# EAGLE board PCB (EAGLE 9.7.0)
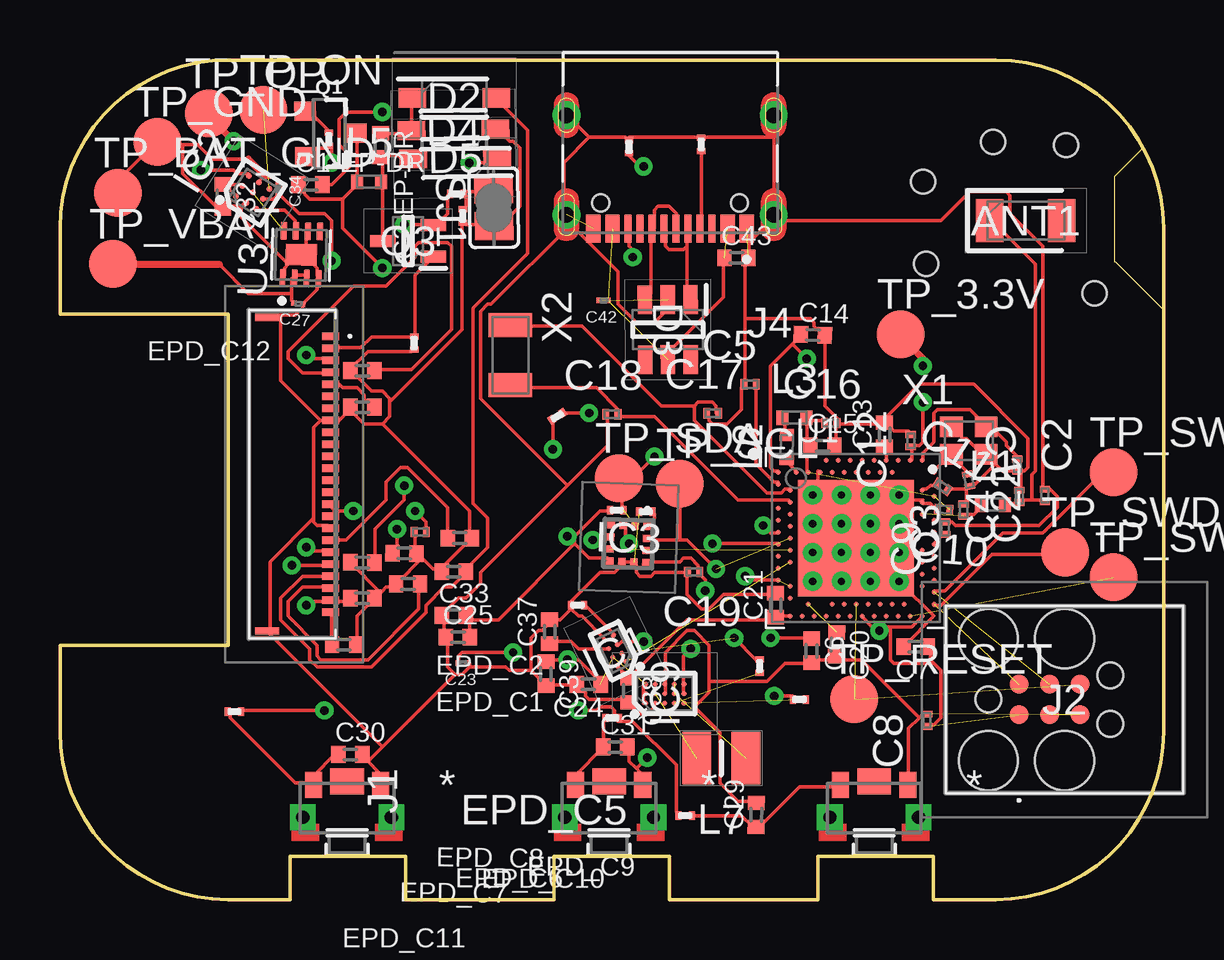
[diagram p0: board, top side]
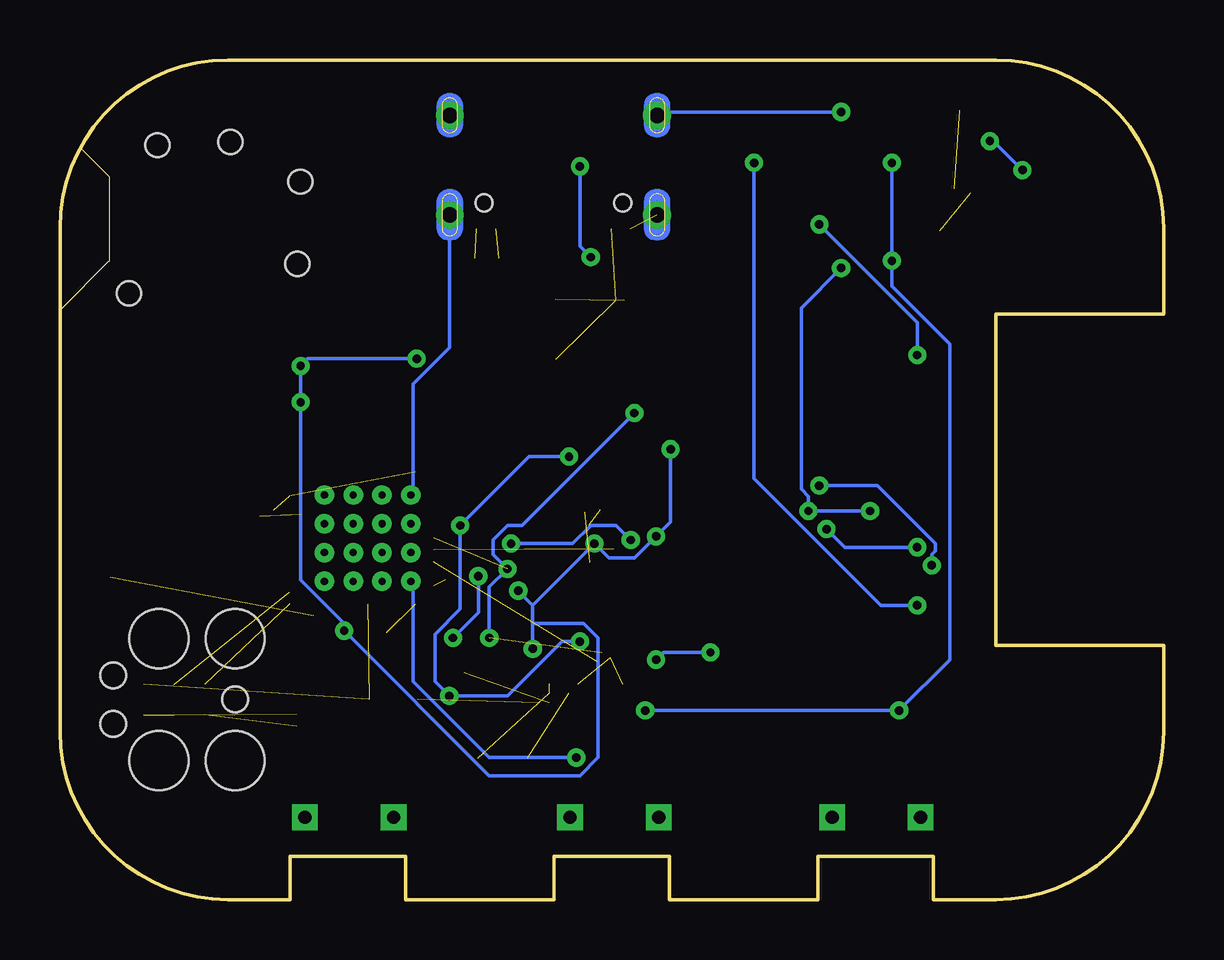
[diagram p1: board, bottom side, seen from below]

Size 46 x 35 mm. Coordinates in mm from the lower left corner, seen from the top.
Outline: 46,24.58 46,7 arc-90 39,0 36.4,0 36.4,1.8 31.6,1.8 31.6,0 25.4,0 25.4,1.8 20.6,1.8 20.6,0 14.4,0 14.4,1.8 9.6,1.8 9.6,0 7,0 arc-90 0,7 0,10.6 7,10.6 7,24.4 0,24.4 0,28 arc-90 7,35 39,35 arc-90 46,28 46,24.58
Outline: 45.15,31.34 43.95,30.13 43.95,26.59 43.99,26.59 46,24.58
Copper layers (1*16): Top 0.035mm / dielectric 1.5mm / Bottom 0.035mm
Design rules "Fusion Electronics Design Rules": minimum track width 0.15mm, minimum drill 0.35mm, track to track 6mil, track to pad 6mil, pad to pad 6mil, via to via 6mil, smd to smd 6mil, copper to edge 40mil, drill to drill 6mil, minimum pad ring 10mil, minimum via ring 8mil, stop-mask expansion 4mil, vias tented up to drill 9999mil, thermal gap 10mil
Holes 1 mm at 41.94,31.45 38.89,31.58 35.97,29.93 36.1,26.5 43.13,25.27

## Footprints (pad centres in the part's own frame; a part is rotated, then mirrored left to right if it is on the bottom)
2450AT18B100E_ANTC3216X140N = smd 1.15 x 1.8: 1 -1.5,0; 2 1.5,0
NORDIC_NRF_3_RESC0201_L = smd 0.28 x 0.43: 1 -0.255,0; 2 0.255,0
PERFECT_0402_0402 = smd 0.6 x 0.7: 1 -0.5,0; 2 0.5,0
GRM011R60J152KE01L_2_CAPC0201X13N = smd 0.22 x 0.23: 1 -0.185,0; 2 0.185,0
ESP32_C6_LIBRARY_5_SOD3716X135N = smd 1.15 x 0.8: 1 -1.75,0; 2 1.75,0
ESP32_C6_LIBRARY_3_SOT95P280X145-6N = smd 1.2 x 0.6: 1 -1.25,0.95; 2 -1.25,0; 3 -1.25,-0.95; 4 1.25,-0.95; 5 1.25,0; 6 1.25,0.95
BQ25180YBGR_BGA8C40P2X4_100X155X50 = smd 0.2 x 0.2: A1 -0.2,0.6; A2 0.2,0.6; B1 -0.2,0.2; B2 0.2,0.2; C1 -0.2,-0.2; C2 0.2,-0.2; D1 -0.2,-0.6; D2 0.2,-0.6
DRV2605YZFR_BGA9C50P3X3_144X144X62 = smd 0.25 x 0.25: A1 -0.5,0.5; A2 0,0.5; A3 0.5,0.5; B1 -0.5,0; B2 0,0; B3 0.5,0; C1 -0.5,-0.5; C2 0,-0.5; C3 0.5,-0.5
BMA423_BMA423 = smd 0.3 x 0.35: 1 -0.75,-0.775; 2 -0.25,-0.775; 3 0.25,-0.775; 4 0.75,-0.775; 7 0.75,0.775; 8 0.25,0.775; 9 -0.25,0.775; 10 -0.75,0.775 | smd 0.35 x 0.3: 5 0.775,-0.25; 6 0.775,0.25; 11 -0.775,0.25; 12 -0.775,-0.25
RT6160AWSC_BGA15C40P3X5_140X230X60 = smd 0.216 x 0.216: A1 -0.4,0.8; A2 0,0.8; A3 0.4,0.8; B1 -0.4,0.4; B2 0,0.4; B3 0.4,0.4; C1 -0.4,0; C2 0,0; C3 0.4,0; D1 -0.4,-0.4; D2 0,-0.4; D3 0.4,-0.4; E1 -0.4,-0.8; E2 0,-0.8; E3 0.4,-0.8
503480-2400_5034802400 = smd 0.3 x 0.7: 1 -5.75,1.525; 2 -5.25,1.525; 3 -4.75,1.525; 4 -4.25,1.525; 5 -3.75,1.525; 6 -3.25,1.525; 7 -2.75,1.525; 8 -2.25,1.525; 9 -1.75,1.525; 10 -1.25,1.525; 11 -0.75,1.525; 12 -0.25,1.525; 13 0.25,1.525; 14 0.75,1.525; 15 1.25,1.525; 16 1.75,1.525; 17 2.25,1.525; 18 2.75,1.525; 19 3.25,1.525; 20 3.75,1.525; 21 4.25,1.525; 22 4.75,1.525; 23 5.25,1.525; 24 5.75,1.525 | smd 0.3 x 1: MP1 -6.54,-1.125; MP2 6.54,-1.125
TC2030-IDC_TC2030IDC = smd 0.783 x 0.783: 1 -0.953,-0.635; 2 -0.953,0.635; 3 0.317,-0.635; 4 0.317,0.635; 5 1.588,-0.635; 6 1.588,0.635 | hole 2.451: -2.223,-2.54; -2.223,2.54; 0.952,-2.54; 0.952,2.54 | hole 1.067: -2.223,0; 2.857,-1.016; 2.857,1.016
KH-TYPE-C-16P_KINGHELM_KH-TYPE-C-16P = smd 0.6 x 1.15: A1_B12 -3.2,4.725; A4_B9 -2.4,4.725; A9_B4 2.4,4.725; A12_B1 3.2,4.725 | smd 0.3 x 1.15: A5 -1.25,4.725; A6 -0.25,4.725; A7 0.25,4.725; A8 1.25,4.725; B5 1.75,4.725; B6 0.75,4.725; B7 -0.75,4.725; B8 -1.75,4.725 | drill 0.65 pad 1.05: SH1 -4.32,0; SH2 4.32,0; SH3 -4.32,4.15; SH4 4.32,4.15 | hole 0.7: -2.89,3.65; 2.89,3.65
NORDIC_NRF_2_RESC0402_L = smd 0.5 x 0.6: 1 -0.5,0; 2 0.5,0
MLP2016SR47MT0S1_INDC2016X100N = smd 1.2 x 2.2: 1 -1.028,0; 2 1.028,0
ESP32_C6_LIBRARY_4_ESP32_C6_LIBRARY_4_ESP32_C6_LIBRARY_4_ESP32_C6_LIBRARY_4_ESP32_WROVER_SPARKFUN-DISCRETESEMI_SOT23-3 = smd 0.8 x 0.9: 1 -0.95,-1; 2 0.95,-1; 3 0,1.1
ESP32_C6_LIBRARY_6_SOT65P210X110-3N = smd 1.05 x 0.5: 1 -1.05,0.65; 2 -1.05,-0.65; 3 1.05,0
CPF0201D7K68C1_0201 = smd 0.35 x 0.25: 1 0,0.275; 2 0,-0.275
ERA-1AEB3401C_0201 = smd 0.35 x 0.25: 1 0,0.275; 2 0,-0.275
ESP32_C6_LIBRARY_7_JUMPER_SJ = smd 1.168 x 1.6: 1 -0.762,0; 2 0.762,0
2025-10-22_07-23-44_LIBRARY_SW_EVP-AKE31A_PAN = smd 0.711 x 1.092: 1 -1.4,-0.972; 2 1.4,-0.972 | drill 0.559 pad 0.914 square: 3 -1.848,0.381; 4 1.848,0.381 | smd 1.397 x 1.092: 5 0,-1.124
HECTOR_WATCH_1_TP20R = smd 2 x 2: TP 0,0
NORDIC_NRF_4_AQFN50P700X700X85_HS-74N = smd 4.85 x 4.85: P$74 0,0 | drill 0.3 pad 0.6: P$75 -1.8,1.8; P$76 -0.6,1.8; P$77 0.6,1.8; P$78 1.8,1.8; P$79 -1.8,0.6; P$80 -0.6,0.6; P$81 0.6,0.6; P$82 1.8,0.6; P$83 -1.8,-0.6; P$84 -0.6,-0.6; P$85 0.6,-0.6; P$86 1.8,-0.6; P$87 -1.8,-1.8; P$88 -0.6,-1.8; P$89 0.6,-1.8; P$90 1.8,-1.8 | smd 0.2 x 0.2: P$A8 -1.25,3.25; P$A10 -0.75,3.25; P$A12 -0.25,3.25; P$A14 0.25,3.25; P$A16 0.75,3.25; P$A18 1.25,3.25; P$A20 1.75,3.25; P$A22 2.25,3.25; P$A23 2.75,3.25; P$AA24 3.25,-2.25; P$AB2 -2.75,-2.5; P$AC5 -2,-2.75; P$AC9 -1,-2.75; P$AC11 -0.5,-2.75; P$AC13 0,-2.75; P$AC15 0.5,-2.75; P$AC17 1,-2.75; P$AC19 1.5,-2.75; P$AC21 2,-2.75; P$AC24 3.25,-2.75; P$AD2 -2.75,-3.25; P$AD4 -2.25,-3.25; P$AD6 -1.75,-3.25; P$AD8 -1.25,-3.25; P$AD10 -0.75,-3.25; P$AD12 -0.25,-3.25; P$AD14 0.25,-3.25; P$AD16 0.75,-3.25; P$AD18 1.25,-3.25; P$AD20 1.75,-3.25; P$AD22 2.25,-3.25; P$AD23 2.75,-3.25; P$B1 -3.25,2.75; P$B3 -2.5,2.75; P$B5 -2,2.75; P$B7 -1.5,2.75; P$B9 -1,2.75; P$B11 -0.5,2.75; P$B13 0,2.75; P$B15 0.5,2.75; P$B17 1,2.75; P$B19 1.5,2.75; P$B24 3.25,2.75; P$C1 -3.25,2.25; P$D2 -2.75,2; P$D23 2.75,2; P$E24 3.25,1.75; P$F2 -2.75,1.5; P$F23 2.75,1.5; P$G1 -3.25,1.25; P$H2 -2.75,1; P$H23 2.75,1; P$J1 -3.25,0.75; P$J24 3.25,0.75; P$K2 -2.75,0.5; P$L1 -3.25,0.25; P$L24 3.25,0.25; P$M2 -2.75,0; P$N1 -3.25,-0.25; P$N24 3.25,-0.25; P$P2 -2.75,-0.5; P$P23 2.75,-0.5; P$R1 -3.25,-0.75; P$R24 3.25,-0.75; P$T2 -2.75,-1; P$T23 2.75,-1; P$U1 -3.25,-1.25; P$U24 3.25,-1.25; P$V23 2.75,-1.5; P$W1 -3.25,-1.75; P$W24 3.25,-1.75; P$Y2 -2.75,-2; P$Y23 2.75,-2
ESP32_C6_LIBRARY_SON50P200X200X80-9N = smd 0.76 x 0.27: 1 -0.985,0.75; 2 -0.985,0.25; 3 -0.985,-0.25; 4 -0.985,-0.75; 5 0.985,-0.75; 6 0.985,-0.25; 7 0.985,0.25; 8 0.985,0.75 | smd 0.9 x 1.3: 9 0,0
NORDIC_NRF_BT-XTAL_2016_N = smd 0.95 x 0.85: 1 -0.725,-0.575; 2 0.725,-0.575; 3 0.725,0.575; 4 -0.725,0.575
NORDIC_NRF_1_XTAL_3215_N = smd 1 x 1.8: 1 -1.25,0; 2 1.25,0

## Placement (x,y rotation side)
ANT1  2450AT18B100E_2450AT18B100E  [2450AT18B100E_ANTC3216X140N]  40.25,28.3 0 top
C1  12pF  [NORDIC_NRF_3_RESC0201_L]  37.88,17.48 281.4 top
C1-EP-DR  10uF  [PERFECT_0402_0402]  10.45,29.8 0 top
C2  12pF  [NORDIC_NRF_3_RESC0201_L]  39.91,18.11 270 top
C2-EP-DR  4.7uF/25V  [PERFECT_0402_0402]  13.37,31.45 270 top
C3  1pF  [NORDIC_NRF_3_RESC0201_L]  37.67,16.24 90 top
C4  1pF  [NORDIC_NRF_3_RESC0201_L]  39.99,16.81 90 top
C5  100nF  [NORDIC_NRF_3_RESC0201_L]  28.76,21.48 0 top
C6  4.7µF  [PERFECT_0402_0402]  31.33,10.37 270 top
C7  100nF  [PERFECT_0402_0402]  35.66,10.54 180 top
C8  100nF  [NORDIC_NRF_3_RESC0201_L]  36.14,7.48 90 top
C9  820pF  [NORDIC_NRF_3_RESC0201_L]  36.9,15.48 90 top
C10  N.C.  [NORDIC_NRF_3_RESC0201_L]  36.84,16.27 175.7 top
C11  100pF  [NORDIC_NRF_3_RESC0201_L]  36.79,17.21 326.6 top
C12  100nF  [NORDIC_NRF_3_RESC0201_L]  35.46,19.13 90 top
C13  N.C.  [PERFECT_0402_0402]  34.37,19.38 90 top
C14  4.7µF  [PERFECT_0402_0402]  31.38,23.54 357.8 top
C15  1.0µF  [PERFECT_0402_0402]  31.78,18.92 0 top
C16  47nF  [NORDIC_NRF_3_RESC0201_L]  32.13,19.87 0 top
C17  12pF  [NORDIC_NRF_3_RESC0201_L]  27.21,20.27 0 top
C18  12pF  [NORDIC_NRF_3_RESC0201_L]  23,20.23 0 top
C19  100nF  [NORDIC_NRF_3_RESC0201_L]  26.41,13.65 180 top
C20  4.7µF  [PERFECT_0402_0402]  32.37,10.63 269.1 top
C21  4.7µF  [PERFECT_0402_0402]  29.83,12.26 90 top
C22  N.C  [NORDIC_NRF_3_RESC0201_L]  41.05,16.84 90 top
C23  0.1uF  [GRM011R60J152KE01L_2_CAPC0201X13N]  16.79,9.86 180 top
C24  10uF  [PERFECT_0402_0402]  22.03,8.97 180 top
C25  22uF  [PERFECT_0402_0402]  16.59,10.94 0 top
C27  0.1uF  [GRM011R60J152KE01L_2_CAPC0201X13N]  9.94,24.84 175.6 top
C29  1uF  [PERFECT_0402_0402]  29.02,3.52 89.1 top
C30  1uF  [PERFECT_0402_0402]  12.1,6.05 0 top
C31  1uF  [PERFECT_0402_0402]  23.14,6.36 0 top
C32  1uF  [PERFECT_0402_0402]  6.79,29.32 270 top
C33  22uF  [PERFECT_0402_0402]  16.41,11.85 0 top
C34  0.1uF  [GRM011R60J152KE01L_2_CAPC0201X13N]  9.11,29.63 270 top
C37  1uF  [PERFECT_0402_0402]  20.41,11.16 90 top
C38  1uF  [PERFECT_0402_0402]  23.72,8.72 270 top
C39  10uF  [PERFECT_0402_0402]  20.26,9.41 270 top
C42  0.1uF  [GRM011R60J152KE01L_2_CAPC0201X13N]  22.66,24.97 180 top
C43  4.7uF  [PERFECT_0402_0402]  28.2,26.75 0 top
D2  ESP32_C6_LIBRARY_5_MBR0530  [ESP32_C6_LIBRARY_5_SOD3716X135N]  16.44,33.42 0 top
D3  ESP32_C6_LIBRARY_3_USBLC6-2SC6Y  [ESP32_C6_LIBRARY_3_SOT95P280X145-6N]  25.34,23.76 270.2 top
D4  ESP32_C6_LIBRARY_5_MBR0530  [ESP32_C6_LIBRARY_5_SOD3716X135N]  16.4,32.08 180.9 top
D5  ESP32_C6_LIBRARY_5_MBR0530  [ESP32_C6_LIBRARY_5_SOD3716X135N]  16.48,30.92 181.3 top
EPD_C1  1uF/50V  [PERFECT_0402_0402]  12.6,20.53 0 top
EPD_C2  1uF/50V  [PERFECT_0402_0402]  12.6,22.05 0 top
EPD_C5  0.1uF/50V  [NORDIC_NRF_3_RESC0201_L]  15.02,15.32 0 top
EPD_C6  1uF/50V  [PERFECT_0402_0402]  16.67,15.07 180 top
EPD_C7  1uF/50V  [PERFECT_0402_0402]  14.36,14.43 179.3 top
EPD_C8  1uF/50V  [PERFECT_0402_0402]  12.6,14.05 359.1 top
EPD_C9  1uF/50V  [PERFECT_0402_0402]  16.41,13.67 0 top
EPD_C10  1uF/50V  [PERFECT_0402_0402]  14.51,13.16 0 top
EPD_C11  1uF/50V  [PERFECT_0402_0402]  12.6,12.56 180 top
EPD_C12  1uF/50V  [PERFECT_0402_0402]  11.84,10.62 180 top
IC1  BQ25180YBGR_BQ25180YBGR  [BQ25180YBGR_BGA8C40P2X4_100X155X50]  23.14,10.37 205.6 top
IC2  DRV2605YZFR_DRV2605YZFR  [DRV2605YZFR_BGA9C50P3X3_144X144X62]  8.03,29.48 57.9 top
IC3  BMA423_BMA423  [BMA423_BMA423]  23.69,14.84 178.1 top
IC9  RT6160AWSC_RT6160AWSC  [RT6160AWSC_BGA15C40P3X5_140X230X60]  25.21,8.59 90 top
J1  503480-2400_503480-2400  [503480-2400_5034802400]  9.76,17.73 270 top
J2  TC2030-IDC_TC2030-IDC  [TC2030-IDC_TC2030IDC]  40.92,8.34 0 top
J4  KH-TYPE-C-16P_KH-TYPE-C-16P  [KH-TYPE-C-16P_KINGHELM_KH-TYPE-C-16P]  25.43,32.69 180 top
L1  3.9nH  [NORDIC_NRF_2_RESC0402_L]  38.89,16.46 0 top
L2  10µH  [NORDIC_NRF_2_RESC0402_L]  30.29,18.86 89.4 top
L3  15nH  [NORDIC_NRF_2_RESC0402_L]  30.62,20.09 0 top
L5  68uH  [NORDIC_NRF_2_RESC0402_L]  12.9,29.92 0 top
L7  MLP2016SR47MT0S1_FTC252012SR47MBCA  [MLP2016SR47MT0S1_INDC2016X100N]  27.57,5.89 0 top
Q1  20V/4.2A/52mΩ/1.4W  [ESP32_C6_LIBRARY_4_ESP32_C6_LIBRARY_4_ESP32_C6_LIBRARY_4_ESP32_C6_LIBRARY_4_ESP32_WROVER_SPARKFUN-DISCRETESEMI_SOT23-3]  11.23,31.93 270.9 top
Q3  ESP32_C6_LIBRARY_6_SI1308EDL-T1-GE3  [ESP32_C6_LIBRARY_6_SOT65P210X110-3N]  14.51,27.46 180 top
R1_EP_DR  0.47  [CPF0201D7K68C1_0201]  16.54,29.42 270 top
R1_USB  5K1  [CPF0201D7K68C1_0201]  26.73,31.48 0 top
R2  0  [ERA-1AEB3401C_0201]  30.83,8.34 90 top
R2_EP_DR  10K  [CPF0201D7K68C1_0201]  14.76,23.19 180 top
R2_USB  5K1  [CPF0201D7K68C1_0201]  23.72,31.39 180 top
R3  0  [ERA-1AEB3401C_0201]  24.42,16.17 90 top
R4  0  [ERA-1AEB3401C_0201]  29.16,9.73 0 top
R5  10k  [CPF0201D7K68C1_0201]  7.27,7.83 90 top
R7  10k  [CPF0201D7K68C1_0201]  26.06,3.5 270 top
R8  10k  [CPF0201D7K68C1_0201]  23.02,7.57 90 top
R9  10K  [CPF0201D7K68C1_0201]  21.58,12.27 90 top
R17  3K3  [ERA-1AEB3401C_0201]  20.73,20.15 122.7 top
R18  3K3  [ERA-1AEB3401C_0201]  23.21,16.24 90 top
R_PWR_EPD  10K  [CPF0201D7K68C1_0201]  11.21,31.7 0 top
R_TYPE_SEL  2.2  [CPF0201D7K68C1_0201]  16.79,28.5 180 top
SJ1  0  [ESP32_C6_LIBRARY_7_JUMPER_SJ]  18.08,28.84 90.7 top
SW_DN  2025-10-22_07-23-44_LIBRARY_EVP-AKE31ASW_EVP-AKE31A_PAN  [2025-10-22_07-23-44_LIBRARY_SW_EVP-AKE31A_PAN]  33.94,3.81 180 top
SW_ENT  2025-10-22_07-23-44_LIBRARY_EVP-AKE31ASW_EVP-AKE31A_PAN  [2025-10-22_07-23-44_LIBRARY_SW_EVP-AKE31A_PAN]  22.89,3.81 180 top
SW_UP  2025-10-22_07-23-44_LIBRARY_EVP-AKE31ASW_EVP-AKE31A_PAN  [2025-10-22_07-23-44_LIBRARY_SW_EVP-AKE31A_PAN]  11.97,3.81 180 top
TP_3.3V  HECTOR_WATCH_1_TPTP20R  [HECTOR_WATCH_1_TP20R]  35.05,23.57 0 top
TP_BAT_GND  HECTOR_WATCH_1_TPTP20R  [HECTOR_WATCH_1_TP20R]  2.41,29.46 0 top
TP_GND  HECTOR_WATCH_1_TPTP20R  [HECTOR_WATCH_1_TP20R]  4.05,31.58 0 top
TP_ON  HECTOR_WATCH_1_TPTP20R  [HECTOR_WATCH_1_TP20R]  8.48,32.91 0 top
TP_OP  HECTOR_WATCH_1_TPTP20R  [HECTOR_WATCH_1_TP20R]  6.2,32.77 0 top
TP_RESET  HECTOR_WATCH_1_TPTP20R  [HECTOR_WATCH_1_TP20R]  33.11,8.35 0 top
TP_SCL  HECTOR_WATCH_1_TPTP20R  [HECTOR_WATCH_1_TP20R]  25.84,17.33 0 top
TP_SDA  HECTOR_WATCH_1_TPTP20R  [HECTOR_WATCH_1_TP20R]  23.3,17.56 0 top
TP_SWDCLK  HECTOR_WATCH_1_TPTP20R  [HECTOR_WATCH_1_TP20R]  43.91,17.81 0 top
TP_SWDIO  HECTOR_WATCH_1_TPTP20R  [HECTOR_WATCH_1_TP20R]  41.9,14.47 0 top
TP_SWO  HECTOR_WATCH_1_TPTP20R  [HECTOR_WATCH_1_TP20R]  43.91,13.43 0 top
TP_VBAT  HECTOR_WATCH_1_TPTP20R  [HECTOR_WATCH_1_TP20R]  2.21,26.49 0 top
U1  NORDIC_NRF_4_NRF52840_QF  [NORDIC_NRF_4_AQFN50P700X700X85_HS-74N]  33.18,15.07 0 top
U3  ESP32_C6_LIBRARY_MAX17048G+T10  [ESP32_C6_LIBRARY_SON50P200X200X80-9N]  10.06,26.88 88.5 top
X1  32MHZ  [NORDIC_NRF_BT-XTAL_2016_N]  37.88,19.13 0 top
X2  32.768kHz  [NORDIC_NRF_1_XTAL_3215_N]  18.77,22.69 270 top

## Library data of the parts
ANT1 = InkTime_v5; ARROW_PART_NUMBER: 2450AT18B100E; ARROW_PRICE-STOCK: https://www.arrow.com/en/products/2450at18b100e/johanson-dielectrics?utm_currency=USD&region=nac; DESCRIPTION: Antennas 2.45GHz ANTENNA; HEIGHT: 1.4mm; MANUFACTURER_NAME: JOHANSON TECHNOLOGY; MANUFACTURER_PART_NUMBER: 2450AT18B100E; MOUSER_PART_NUMBER: 609-2450AT18B100E; MOUSER_PRICE-STOCK: https://www.mouser.co.uk/ProductDetail/Johanson-Technology/2450AT18B100E?qs=yCnrNFeXz%252Bh5MFsFIXGZGA%3D%3D
C1 C1-EP-DR C2 C2-EP-DR C3-C22 C24 C25 C29-C33 C37-C39 C43 EPD_C1 EPD_C2 EPD_C5-EPD_C12 L1-L3 L5 R1_EP_DR R1_USB R2 R2_EP_DR R2_USB R3-R5 R7-R9 R17 R18 R_PWR_EPD R_TYPE_SEL SJ1 TP_3.3V TP_BAT_GND TP_GND TP_ON TP_OP TP_RESET TP_SCL TP_SDA TP_SWDCLK TP_SWDIO TP_SWO TP_VBAT U1 X1 X2 = InkTime_v5
C23 C27 C34 C42 = InkTime_v5; AVAILABILITY: In Stock; CHECK_PRICES: https://www.snapeda.com/parts/GRM011R60J152KE01L/Murata/view-part/?ref=eda; DESCRIPTION: SMD Capacitor X5R(EIA) with Capacitance: 1500pF Tol. 10%. Rated Voltage: 6.3Vdc; MF: Murata; MP: GRM011R60J152KE01L; PACKAGE: 0201 Murata; PRICE: None; SNAPEDA_LINK: https://www.snapeda.com/parts/GRM011R60J152KE01L/Murata/view-part/?ref=snap
D2 D4 D5 = InkTime_v5; AVAILABILITY: In Stock; CHECK_PRICES: https://www.snapeda.com/parts/MBR0530/Onsemi/view-part/?ref=eda; DESCRIPTION: Diode Schottky 30 V 500mA Surface Mount SOD-123; MF: ON Semiconductor; MP: MBR0530; PACKAGE: SOD-123-2 ON Semiconductor; PRICE: None; PURCHASE-URL: https://www.snapeda.com/api/url_track_click_mouser/?unipart_id=179458&manufacturer=ON Semiconductor&part_name=MBR0530&search_term=None; SNAPEDA_LINK: https://www.snapeda.com/parts/MBR0530/Onsemi/view-part/?ref=snap
D3 = InkTime_v5; AVAILABILITY: In Stock; CHECK_PRICES: https://www.snapeda.com/parts/USBLC6-2SC6Y/STMicroelectronics/view-part/?ref=eda; DESCRIPTION: 17V Clamp 5A (8/20µs) Ipp Tvs Diode Surface Mount SOT-23-6; MF: STMicroelectronics; MP: USBLC6-2SC6Y; PACKAGE: SOT-23-6 STMicroelectronics; PRICE: None; SNAPEDA_LINK: https://www.snapeda.com/parts/USBLC6-2SC6Y/STMicroelectronics/view-part/?ref=snap
IC1 = InkTime_v5; ARROW_PART_NUMBER: BQ25180YBGR; ARROW_PRICE-STOCK: https://www.arrow.com/en/products/bq25180ybgr/texas-instruments?utm_currency=USD&region=nac; DESCRIPTION: Charger IC Lithium Ion/Polymer, Lithium Iron Phosphate 8-DSBGA (1.6x1.1); HEIGHT: 0.5mm; MANUFACTURER_NAME: Texas Instruments; MANUFACTURER_PART_NUMBER: BQ25180YBGR; MOUSER_PART_NUMBER: 595-BQ25180YBGR; MOUSER_PRICE-STOCK: https://www.mouser.co.uk/ProductDetail/Texas-Instruments/BQ25180YBGR?qs=doiCPypUmgEWjAK%252BJAX6Tw%3D%3D
IC2 = InkTime_v5; ARROW_PART_NUMBER: DRV2605YZFR; ARROW_PRICE-STOCK: https://www.arrow.com/en/products/drv2605yzfr/texas-instruments?region=nac; DESCRIPTION: Haptic Driver for ERM/LRA with Built-In Library and Smart Loop Architecture; HEIGHT: 0.625mm; MANUFACTURER_NAME: Texas Instruments; MANUFACTURER_PART_NUMBER: DRV2605YZFR
IC3 = InkTime_v5; ARROW_PART_NUMBER: BMA423; ARROW_PRICE-STOCK: https://www.arrow.com/en/products/bma423/bosch; DESCRIPTION: Accelerometers Triaxial low-g 12bit Acceleration Sensor; HEIGHT: 1mm; MANUFACTURER_NAME: BOSCH; MANUFACTURER_PART_NUMBER: BMA423; MOUSER_PART_NUMBER: 262-BMA423; MOUSER_PRICE-STOCK: https://www.mouser.co.uk/ProductDetail/Bosch-Sensortec/BMA423?qs=HXFqYaX1Q2xC%252BSgeGoX3mg%3D%3D
IC9 = InkTime_v5; DESCRIPTION: Buck-Boost Regulator Positive Output Step-Up/Step-Down I2C DC-DC Controller IC 15-WL-CSP (BSC) (1.4x2.3); HEIGHT: 0.6mm; MANUFACTURER_NAME: RICHTEK; MANUFACTURER_PART_NUMBER: RT6160AWSC; MOUSER_PART_NUMBER: 835-RT6160AWSC; MOUSER_PRICE-STOCK: https://www.mouser.co.uk/ProductDetail/Richtek/RT6160AWSC?qs=amGC7iS6iy%2FLd9PSoixZXQ%3D%3D
J1 = InkTime_v5; DESCRIPTION: FFC & FPC Connectors 0.5mm FPC RA SMT Dual Contact 24Ckt; HEIGHT: 1.87mm; MANUFACTURER_NAME: Molex; MANUFACTURER_PART_NUMBER: 503480-2400; MOUSER_PART_NUMBER: 538-503480-2400; MOUSER_PRICE-STOCK: https://www.mouser.co.uk/ProductDetail/Molex/503480-2400?qs=OAhjpuo3Vu7efIoxFh9AOw%3D%3D
J2 = InkTime_v5; DESCRIPTION: CABLE ADAPTER 6 POS; HEIGHT: 19mm; MANUFACTURER_NAME: Tag Connect; MANUFACTURER_PART_NUMBER: TC2030-IDC
J4 = InkTime_v5; AVAILABILITY: Not in stock; CHECK_PRICES: https://www.snapeda.com/parts/KH-TYPE-C-16P/Kinghelm/view-part/?ref=eda; MF: kinghelm; MP: KH-TYPE-C-16P; PACKAGE: None; PRICE: None; SNAPEDA_LINK: https://www.snapeda.com/parts/KH-TYPE-C-16P/Kinghelm/view-part/?ref=snap
L7 = InkTime_v5; DESCRIPTION: SMD / SMT Inductors (Coils), L=0.47?H, L x W x T :; HEIGHT: 1mm; JLCPCB: https://jlcpcb.com/partdetail/6763488-FTC252012SR47MBCA/C5832368; MANUFACTURER_NAME: TDK; MANUFACTURER_PART_NUMBER: FTC252012SR47MBCA
Q1 = InkTime_v5; PROD_ID: TRAN-14388
Q3 = InkTime_v5; AVAILABILITY: In Stock; CHECK_PRICES: https://www.snapeda.com/parts/SI1308EDL-T1-GE3/Vishay+Siliconix/view-part/?ref=eda; DESCRIPTION: Si1308EDL-T1-GE3 N-channel MOSFET Transistor, 1.5 A, 30 V, 3-Pin SC-70 | Siliconix / Vishay SI1308EDL-T1-GE3; MF: Vishay Siliconix; MP: SI1308EDL-T1-GE3; PACKAGE: SOT-323 Vishay Semiconductor; PRICE: None; PURCHASE-URL: https://www.snapeda.com/api/url_track_click_mouser/?unipart_id=274603&manufacturer=Vishay Siliconix&part_name=SI1308EDL-T1-GE3&search_term=None; SNAPEDA_LINK: https://www.snapeda.com/parts/SI1308EDL-T1-GE3/Vishay+Siliconix/view-part/?ref=snap
SW_DN SW_ENT SW_UP = InkTime_v5; COPYRIGHT: Copyright (C) 2025 Ultra Librarian. All rights reserved.; DIGI-KEY_PART_NUMBER_1: P123437TR-ND; DIGI-KEY_PART_NUMBER_2: P123437CT-ND; DIGI-KEY_PART_NUMBER_3: P123437DKR-ND; MANUFACTURER_NAME: Panasonic; MANUFACTURER_PART_NUMBER: EVP-AKE31A
U3 = InkTime_v5; AVAILABILITY: In Stock; CHECK_PRICES: https://www.snapeda.com/parts/MAX17048G+T10/Analog+Devices/view-part/?ref=eda; DESCRIPTION: 3µA 1-Cell/2-Cell Fuel Gauge with ModelGauge; MF: Analog Devices; MP: MAX17048G+T10; PACKAGE: TDFN-8 Maxim; PRICE: None; PURCHASE-URL: https://www.snapeda.com/api/url_track_click_mouser/?unipart_id=329239&manufacturer=Analog Devices&part_name=MAX17048G+T10&search_term=None; SNAPEDA_LINK: https://www.snapeda.com/parts/MAX17048G+T10/Analog+Devices/view-part/?ref=snap

## Nets
3V3/1.7D: C34.2 IC2.C2 Q1.2 R5.2 R7.2 R8.2 R_PWR_EPD.2
3V3/2.4A: C7.1 C8.1 C12.1 C14.1 C19.1 C25.2 C33.2 IC3.3 IC3.7 IC3.10 IC9.E2 IC9.E3 J2.1 R17.1 R18.1 TP_3.3V.TP U1.P$A22 U1.P$AD14 U1.P$AD23 U1.P$B1
ALERT/1.6C: U3.5
ALERT/2.5C: U1.P$J24
D+/1.5D: D3.4
D+/2.7D: U1.P$AD6
D-/1.5D: D3.6
D-/2.7D: U1.P$AD4
DN: D3.1 J4.A7 J4.B7
DP: D3.3 J4.A6 J4.B6
EPD_3V3: C1-EP-DR.1 EPD_C5.2 J1.15 J1.16 L5.1 Q1.3
EPD_BUSY/1.5D: J1.9
EPD_BUSY/2.2D: U1.P$AC11
EPD_CD/1.4C: J1.12
EPD_CS/2.2D: U1.P$K2
EPD_DC/1.5D: J1.11
EPD_DC/2.2D: U1.P$AD10
EPD_RST/1.5D: J1.10
EPD_RST/2.2D: U1.P$AD12
GDR: J1.2 Q3.1 R2_EP_DR.2
GND: C1-EP-DR.2 C1.2 C2.2 C3.2 C4.2 C5.1 C6.2 C7.2 C8.2 C9.2 C10.2 C11.2 C12.2 C13.2 C14.2 C15.2 C16.2 C17.1 C18.1 C19.2 C20.2 C21.2 C22.2 C23.1 C24.2 C25.1 C27.1 C29.2 C30.2 C31.2 C32.2 C33.1 C34.1 C37.2 C38.2 C39.2 C42.2 C43.2 D3.2 D4.1 EPD_C1.1 EPD_C2.1 EPD_C5.1 EPD_C6.1 EPD_C7.1 EPD_C8.1 EPD_C9.1 EPD_C10.1 EPD_C11.1 EPD_C12.1 IC1.D2 IC2.B1 IC2.B3 IC3.8 IC3.9 IC9.B1 IC9.C2 IC9.C3 J1.8 J1.17 J1.MP1 J1.MP2 J2.3 J2.5 J4.A1_B12 J4.A12_B1 J4.SH1 J4.SH2 J4.SH3 J4.SH4 R1_USB.1 R2_EP_DR.1 R2_USB.2 R3.1 R9.1 R_TYPE_SEL.1 SJ1.1 SW_DN.1 SW_ENT.1 SW_UP.1 TP_BAT_GND.TP TP_GND.TP U1.P$74 U1.P$75 U1.P$76 U1.P$77 U1.P$78 U1.P$79 U1.P$80 U1.P$81 U1.P$82 U1.P$83 U1.P$84 U1.P$85 U1.P$86 U1.P$87 U1.P$88 U1.P$89 U1.P$90 U1.P$B7 U1.P$F23 U3.1 U3.4 U3.6 U3.9 X1.2 X1.4
HAPTIC_EN/1.4C: IC2.A1
HAPTIC_EN/2.6A: U1.P$U1
IMU_INT1: IC3.5 U1.P$N1
IMU_INT2: IC3.6 U1.P$P2
LX1: IC9.B2 L7.1
LX2: IC9.D2 IC9.D3 L7.2
MOSI/1.5B: J1.14
MOSI/2.2D: U1.P$B13
N$1: IC3.1 R3.2
N$2: C20.1 U1.P$AC5
N$3: C6.1 U1.P$W1 U1.P$Y2
N$4: C18.2 U1.P$F2 X2.2
N$5: C17.2 U1.P$D2 X2.1
N$6: C5.2 U1.P$C1
N$8: L2.2 L3.1
N$9: IC1.D1 R9.2
N$10: IC9.D1 R4.2
N$11: IC9.E1 R2.2
N$12: L2.1 U1.P$B3
N$13: C3.1 L1.1 U1.P$H23
N$14: C13.1 U1.P$A18
N$15: C10.1 C15.1 C16.1 L3.2 U1.P$B5 U1.P$E24
N$16: C9.1 U1.P$N24
N$17: C1.1 U1.P$B24 X1.1
N$18: C11.1 U1.P$D23
N$19: C2.1 U1.P$A23 X1.3
N$20: ANT1.1 C4.1 C22.1 L1.2
N$21: J4.A5 R1_USB.2
N$22: C2-EP-DR.2 D5.2 L5.2 Q3.3
N$23: C2-EP-DR.1 D2.1 D4.2
N$26: C32.1 IC2.A2
N$27: R1_EP_DR.1 R_TYPE_SEL.2 SJ1.2
N$30: EPD_C2.2 J1.4
N$31: EPD_C1.2 J1.5
N$32: J4.B5 R2_USB.1
N$33: EPD_C12.2 J1.24
N$35: EPD_C10.2 J1.22
N$36: EPD_C8.2 J1.20
N$37: EPD_C7.2 J1.19
N$38: EPD_C6.2 J1.18
OUT+: IC2.A3 TP_OP.TP
OUT-: IC2.C3 TP_ON.TP
P0.04: U1.P$J1
P0.09: U1.P$L24
P0.13/1.5D: C30.1 R5.1 SW_UP.2
P0.13/2.6C: U1.P$AD8
P0.14/1.5D: C31.1 R8.1 SW_ENT.2
P0.14/2.7C: U1.P$AC9
P0.19: U1.P$AC15
P0.20: U1.P$AD16
P0.21: U1.P$AC17
P0.22: U1.P$AD18
P0.23: U1.P$AC19
P0.24: U1.P$AD20
P0.25: U1.P$AC21
P0.26: U1.P$G1
P0.27: U1.P$H2
P0.28: U1.P$B11
P0.29: U1.P$A10
P0.30: U1.P$B9
P0.31: U1.P$A8
P1.01/1.6C: Q1.1 R_PWR_EPD.1
P1.01/2.4B: U1.P$Y23
P1.02/1.6C: C29.1 R7.1 SW_DN.2
P1.02/2.8C: U1.P$W24
P1.03: U1.P$V23
P1.04: U1.P$U24
P1.05: U1.P$T23
P1.07: U1.P$P23
P1.09: U1.P$R1
P1.10: U1.P$A20
P1.11: U1.P$B19
P1.12: U1.P$B17
P1.13: U1.P$A16
P1.14: U1.P$B15
P1.15: U1.P$A14
P1/06: U1.P$R24
PMIC_INT: IC1.A1 U1.P$T2
PREVGH: D5.1 EPD_C11.2 J1.23
PREVGL: D2.2 EPD_C9.2 J1.21
RESE: J1.3 Q3.2 R1_EP_DR.2
RESET: J2.6 TP_RESET.TP U1.P$AC13
SCK/1.5B: J1.13
SCK/2.2D: U1.P$A12
SCL/1.4C: IC2.C1 U3.7
SCL/2.4C: IC1.B1 IC3.12 R4.1 R17.2 TP_SCL.TP U1.P$M2
SDA/1.4C: IC2.B2 U3.8
SDA/2.4C: IC1.C1 IC3.2 R2.1 R18.2 TP_SDA.TP U1.P$L1
SWDCLK: J2.4 TP_SWDCLK.TP U1.P$AA24
SWDIO: J2.2 TP_SWDIO.TP U1.P$AC24
SWO: TP_SWO.TP U1.P$AD22
VBAT/1.2A: C27.2 TP_VBAT.TP U3.2 U3.3
VBAT/2.5C: C37.1 IC1.C2
VBUS/1.5D: C42.1 C43.1 D3.5 J4.A4_B9 J4.A9_B4
VBUS/2.6D: C21.1 C38.1 IC1.A2 U1.P$AD2
VREG: C23.2 C24.1 C39.1 IC1.B2 IC9.A1 IC9.A2 IC9.A3

## Tracks (layer width: path | path; a pad name or v marks a point on that pad's centre or on a via)
3V3/1.7D  (via drill 0.35)
  Top 0.15: Q1.2 10.27,31.02 10.57,31.32 11.17,31.32 R_PWR_EPD.2 11.32,31.32 v11.32,30.71 | IC2.C2 8.9,29.2 9.06,29.35 C34.2 9.21,29.35 9.96,28.6 11.02,28.6 11.32,28.29 v11.32,26.63 | v11.02,7.88 7.54,7.88 R5.2 | v21.61,7.88 22.36,7.88 22.51,8.03 22.97,8.03 23.12,7.88 23.12,7.73 23.27,7.58 R8.2 23.27,7.43 23.87,7.43 25.69,5.61 25.69,3.65 R7.2
  Bottom 0.15: v21.61,7.88 v11.02,7.88 8.9,10 8.9,23.15 11.32,25.57 v11.32,26.63 v11.32,30.71
3V3/2.4A  (via drill 0.35)  (1 unrouted)
  Top 0.15: 17.07,11.66 17.07,11.06 C25.2 | 17.07,11.66 16.92,11.81 C33.2 17.07,11.66 | 21.45,14.84 22.06,14.23 22.82,14.23 IC3.7 | 21.45,15.14 21.45,14.84 | 21.45,15.14 22.51,16.2 22.82,16.2 R18.1 | 17.07,11.66 18.28,11.66 21.45,14.84 | IC9.E2 25.99,8.64 25.99,8.94 IC9.E3 25.99,9.09 25.99,10.15 v26.29,10.45 | v26.9,12.87 26.9,13.33 26.6,13.63 C19.1 26.6,13.78 26.6,13.93 26.29,14.23 25.99,14.23 25.84,14.08 24.48,14.08 IC3.10 | v23.72,14.84 23.57,14.99 23.57,15.59 IC3.3 | v20.55,18.77 20.55,19.98 R17.1 | v21.15,15.14 21.45,15.14 | 34.61,11.36 35.52,11.36 35.97,11.81 U1.P$AD23 | 34.61,11.36 34.16,11.36 | 34.16,11.36 33.85,11.36 33.4,11.81 U1.P$AD14 | 36.42,9.85 36.27,10 36.27,10.45 C7.1 | 36.42,9.85 36.72,9.55 36.72,7.58 36.42,7.28 36.27,7.28 C8.1 | 34.61,11.36 34.61,10 34.76,9.85 36.42,9.85 | 30.53,23.15 30.83,23.46 C14.1 | 30.53,23.15 29.62,22.25 29.62,18.01 29.77,17.86 29.92,17.86 U1.P$B1 | U1.P$A22 35.52,18.32 35.52,18.77 C12.1 35.52,18.92 35.82,18.92 35.97,19.07 v35.97,20.73 | 35.97,22.55 v35.97,22.25 | 35.06,23.46 TP_3.3V.TP | v31.13,22.55 30.53,23.15 | v34.16,11.21 34.16,11.36
  Top 0.3: 35.06,23.46 35.97,22.55
  Bottom 0.15: 26.29,12.27 26.29,11.51 | 26.29,11.51 v26.29,10.45 | v26.9,12.87 26.29,12.27 | 26.29,12.27 v23.72,14.84 23.12,14.23 22.06,14.23 v21.15,15.14 20.55,15.75 v20.55,18.77 | v31.13,22.55 35.67,22.55 v35.97,22.25 v35.97,20.73 35.97,13.33 34.16,11.51 v34.16,11.21 28.11,5.16 24.33,5.16 23.57,5.92 23.57,10.91 24.18,11.51 26.29,11.51
DN
  Top 0.15: 26.14,27.24 25.99,27.09 25.39,27.09 25.23,27.24 25.23,27.84 J4.A7 | 26.14,27.24 26.14,27.84 J4.B7 | 26.14,27.24 26.14,25.12 D3.1
DP
  Top 0.15: D3.3 24.48,25.12 24.63,25.27 24.63,27.84 J4.B6 24.78,27.99 24.78,28.75 24.93,28.9 25.39,28.9 25.69,28.6 25.69,27.99 J4.A6
EPD_3V3  (via drill 0.35)
  Top 0.15: v14.8,16.2 15.25,15.75 15.25,15.44 EPD_C5.2 | 11.48,16.2 v12.23,16.2 | 11.48,16.2 11.32,16.35 J1.15 | 11.48,16.2 11.32,16.05 J1.16 | Q1.3 12.38,31.92 12.38,29.96 L5.1 12.38,29.81 11.78,29.2 | 11.78,29.2 10.42,29.2 9.96,29.66 C1-EP-DR.1 | v13.44,26.33 11.78,27.99 11.78,29.2
  Bottom 0.15: v12.23,16.2 v14.8,16.2 14.8,16.8 15.1,17.11 15.1,24.67 v13.44,26.33
GDR
  Top 0.15: Q3.1 15.56,26.78 14.8,26.03 14.8,23.46 R2_EP_DR.2 14.65,23.46 12.99,23.46 12.53,23 11.32,23 J1.2
GND  (via drill 0.35)  (6 unrouted)
  Top 0.15: 24.02,5.46 24.18,5.31 24.18,4.86 SW_ENT.1 | 24.02,5.46 23.72,5.77 23.72,6.22 C31.2 | C10.2 36.57,16.2 36.27,16.5 35.97,16.5 U1.P$F23 35.97,16.65 35.21,16.65 35.06,16.8 | 31.43,16.95 31.58,17.11 31.58,17.86 U1.P$B7 | C7.2 35.21,10.6 36.42,11.81 35.06,13.17 U1.P$74 | 31.43,14.38 31.43,13.33 U1.P$87 | 31.43,14.38 U1.P$83 | 31.43,14.38 U1.P$74 | 32.04,16.35 31.43,15.75 U1.P$79 | 32.64,14.38 32.64,13.33 U1.P$88 | 32.64,14.38 U1.P$84 | 32.64,14.38 U1.P$74 | U1.P$80 32.64,15.75 U1.P$74 | 34.31,13.78 33.85,13.33 U1.P$89 | 34.31,13.78 34.31,13.93 U1.P$74 | U1.P$85 33.7,14.54 U1.P$74 | U1.P$90 34.91,13.33 U1.P$74 | 34.31,13.78 34.91,14.38 U1.P$86 | 34.31,13.78 U1.P$74 | U1.P$81 33.85,15.75 U1.P$74 | 31.43,16.95 U1.P$75 | 31.43,16.95 U1.P$74 | 32.04,16.35 32.49,16.8 U1.P$76 | 32.04,16.35 U1.P$74 | 34.46,16.2 33.85,16.8 U1.P$77 | 34.46,16.2 34.91,15.75 U1.P$82 | 34.46,16.2 U1.P$74 | 35.06,16.8 U1.P$78 | 35.06,16.8 U1.P$74 | v24.48,5.92 24.02,5.46 | 21.3,28.14 21,28.45 J4.SH4 | 21.3,28.14 23.27,26.18 23.27,24.82 24.02,24.06 24.78,24.06 25.23,24.51 25.23,24.97 D3.2 | v13.44,32.83 11.93,32.83 11.63,32.53 11.63,31.47 12.08,31.02 12.08,30.56 11.32,29.81 11.02,29.81 C1-EP-DR.2 | 22.06,31.77 23.57,31.77 R2_USB.2 23.72,31.77 26.6,31.77 R1_USB.1 26.75,31.77 29.77,31.77 | 22.06,31.77 21.15,32.68 J4.SH2 | 22.06,31.77 21,30.71 21,28.6 J4.SH4 | 37.78,17.11 37.78,16.5 C3.2 | 37.78,17.11 37.03,17.11 C11.2 | 37.78,17.11 C1.2 37.94,17.26 38.09,17.26 38.99,18.16 | 40.05,17.86 40.05,17.11 C4.2 | 38.99,18.16 38.69,18.47 X1.2 | 38.99,18.16 39.3,17.86 C2.2 40.05,17.86 | X1.4 37.18,19.68 37.63,19.22 37.78,19.22 38.54,18.47 X1.2 | 38.99,18.16 X1.2
  Top 0.15: C12.2 35.36,19.53 34.76,19.53 34.46,19.83 C13.2 | C16.2 32.34,19.83 32.34,18.92 C15.2 | C16.2 32.49,19.98 31.89,20.58 31.89,23.46 C14.2 31.74,23.61 31.43,23.91 31.43,24.06 31.28,24.21 28.56,24.21 | C13.2 34.31,19.83 32.49,19.83 C16.2 | 40.05,17.86 40.2,17.86 40.35,18.01 40.35,19.22 38.09,21.49 35.82,21.49 34.31,19.98 C13.2 | C9.2 37.03,15.75 37.18,15.75 37.33,15.59 40.81,15.59 41.56,16.35 41.56,16.8 41.26,17.11 41.11,17.11 C22.2 40.96,17.11 40.96,27.24 39.6,28.6 39.6,29.35 39.45,29.5 37.94,29.5 36.72,28.29 29.62,28.29 | C17.1 27.05,20.13 27.05,19.98 27.2,19.83 27.8,19.83 28.41,20.43 28.41,21.34 C5.1 28.56,21.49 28.56,24.21 | 29.62,28.29 29.77,28.45 J4.SH3 | 29.62,28.29 28.71,27.39 28.71,26.78 C43.2 28.56,26.63 28.56,24.21 | 29.77,31.77 29.77,32.68 J4.SH1 | 29.77,31.77 29.77,28.6 J4.SH3 | 29.62,28.29 J4.SH3 | 10.11,24.82 10.72,25.42 10.72,25.88 U3.4 10.72,26.03 10.72,26.33 10.11,26.93 | 9.21,24.36 9.81,24.36 10.11,24.67 10.11,24.82 | 9.21,24.36 8.75,24.36 J1.MP1 | 10.11,24.82 C27.1 | 7.54,28.9 7.7,29.05 IC2.B1 | 7.54,28.9 6.94,28.9 C32.2 6.79,28.9 6.48,28.9 5.12,30.26 5.12,31.47 | 9.51,26.48 9.96,26.93 U3.9 | 9.51,26.48 9.36,26.33 9.36,26.03 U3.1 | 10.11,26.93 10.27,27.09 10.27,27.84 U3.6 | 7.54,28.9 7.54,28.45 9.51,26.48 | 9.51,26.48 U3.9 | 10.11,26.93 U3.9 | 8.45,30.11 8.9,30.11 9.06,29.96 9.06,29.81 C34.1 | 8.45,30.11 8.3,29.96 IC2.B3 | 8.45,30.26 8.45,30.11 | 7.85,30.87 6.33,30.87 5.73,31.47 5.12,31.47 | 5.12,31.47 4.07,31.47 TP_GND.TP 3.91,31.47 2.55,30.11 2.55,29.5 TP_BAT_GND.TP | EPD_C5.1 14.8,15.29 14.8,14.54 EPD_C7.1 | 15.86,13.78 15.56,13.78 15.1,14.23 | 15.1,14.23 14.95,14.38 EPD_C7.1
  Top 0.15: 15.86,13.78 17.07,14.99 EPD_C6.1 17.07,15.14 17.07,16.2 13.44,19.83 | 15.86,13.78 EPD_C9.1 | EPD_C12.1 12.38,10.76 12.38,11.81 12.99,12.42 EPD_C11.1 13.14,12.57 13.44,12.87 | 13.44,12.87 13.59,13.02 13.89,13.02 EPD_C10.1 14.05,13.17 15.1,14.23 | 13.44,12.87 13.29,12.87 12.23,13.93 EPD_C8.1 | 15.1,14.23 EPD_C7.1 | D4.1 18.28,32.07 18.73,31.62 18.88,31.62 19.19,31.32 19.19,28.9 18.43,28.14 18.13,28.14 SJ1.1 17.98,28.14 16.92,28.14 R_TYPE_SEL.1 16.77,28.14 16.77,23.76 13.74,20.73 | R2_EP_DR.1 14.65,22.85 12.84,22.85 12.08,22.1 EPD_C2.1 12.23,21.94 12.99,21.19 13.44,21.19 13.74,20.89 13.74,20.73 | 10.57,15.9 10.57,19.68 10.87,19.98 | 10.57,15.9 10.57,15.75 10.72,15.59 11.17,15.59 J1.17 | 10.87,19.98 11.17,19.98 J1.8 11.32,19.98 11.63,19.98 12.08,20.43 | 10.57,15.9 8.75,14.08 8.75,11.21 J1.MP2 8.75,11.06 13.44,6.37 | 13.74,20.73 13.74,20.13 13.44,19.83 | 13.44,19.83 12.68,19.83 12.08,20.43 | 12.08,20.43 EPD_C1.1 | 9.21,24.36 9.21,21.64 10.87,19.98 | 12.84,5.77 13.29,5.31 13.29,4.86 SW_UP.1 | 12.84,5.77 12.68,5.92 C30.2 12.84,5.77 | 17.07,9.7 17.07,9.85 C23.1 | 17.07,9.7 16.77,9.39 16.46,9.39 | 16.46,9.39 16.16,9.7 16.16,10.91 C25.1 16.01,11.06 16.01,11.81 C33.1 16.01,11.96 16.62,12.57 16.92,12.57 17.52,13.17 17.52,13.63 21.15,17.26 | 21.15,17.26 22.82,18.92 22.82,20.13 C18.1 | 16.46,9.39 13.44,6.37 | 13.44,6.37 12.84,5.77 | 21.3,12.12 21.61,11.81 21.76,11.81 22.66,10.91 IC1.D2 | 21.3,12.12 R9.1 | 21.3,12.12 20.85,11.66 20.55,11.66 C37.2 20.4,11.51 20.09,11.21 19.94,11.21 19.64,10.91 19.64,9.55 | 21.3,12.12 R9.1 | 26.14,13.63 24.78,13.63 24.63,13.48 24.18,13.48 24.02,13.63 24.02,13.93 IC3.9 23.87,14.08 23.42,14.08 IC3.8 23.42,13.93 23.12,13.63 22.51,13.63 21.3,12.42 R9.1
  Top 0.15: 26.14,13.63 26.14,12.72 26.75,12.12 27.05,12.12 27.65,12.72 29.77,12.72 C21.2 | 26.14,13.63 C19.2 | 35.82,7.58 35.36,7.13 35.36,4.86 SW_DN.1 | 35.82,7.58 35.97,7.73 36.12,7.73 C8.2 | 35.82,7.58 33.4,10 32.49,10 C20.2 32.34,10 31.43,10 C6.2 31.28,9.85 30.22,9.85 29.47,9.09 27.05,9.09 | IC9.C2 25.23,8.64 25.23,8.94 IC9.C3 25.23,9.09 25.23,10.3 26.14,11.21 26.44,11.21 27.05,10.6 27.05,9.09 | 24.78,8.03 24.78,8.18 IC9.B1 | 24.78,8.03 24.48,7.73 24.18,7.73 23.72,8.18 C38.2 23.57,8.34 22.06,8.34 21.91,8.49 21.91,8.64 21.61,8.94 C24.2 21.45,8.94 20.4,8.94 C39.2 20.24,8.94 19.64,9.55 | 27.05,9.09 27.05,8.64 26.44,8.03 | 26.44,8.03 26.14,7.73 25.08,7.73 24.78,8.03 | 26.44,8.03 27.5,6.98 27.5,4.86 28.26,4.1 29.01,4.1 C29.2 | 17.07,9.7 18.58,9.7 18.73,9.55 19.64,9.55 | 21.3,28.14 17.98,24.82 17.82,24.82 17.52,24.51 17.52,20.89 21.15,17.26 | 21.3,28.14 J4.SH4
  Top 0.3: 7.85,30.87 8.45,30.26
  Bottom 0.15: v24.48,5.92 28.11,5.92 31.28,9.09 31.28,13.17 U1.P$87 | v13.44,32.83 21,32.83 J4.SH2 | U1.P$75 31.28,16.95 31.28,21.49 29.77,23 29.77,28.45 J4.SH3
IMU_INT1  (via drill 0.35)
  Top 0.15: v27.2,14.84 29.92,14.84 U1.P$N1 | v22.21,14.99 22.51,14.99 22.66,15.14 22.82,15.14 IC3.5
  Bottom 0.15: v27.2,14.84 24.63,14.84 23.87,15.59 22.82,15.59 v22.21,14.99
IMU_INT2  (1 unrouted)
LX1  (1 unrouted)
LX2  (2 unrouted)
N$1
  Top 0.15: IC3.1 24.78,15.9 24.78,16.05 R3.2
N$2  (1 unrouted)
N$3  (via drill 0.35)  (1 unrouted)
  Top 0.15: v28.56,13.48 28.71,13.33 U1.P$W1 | v29.62,10.91 31.28,10.91 C6.1
  Bottom 0.15: v28.56,13.48 28.56,11.96 v29.62,10.91
N$4
  Top 0.15: U1.P$F2 30.38,16.65 28.26,16.65 24.78,20.13 23.27,20.13 C18.2 23.27,20.28 23.27,20.43 22.36,21.34 18.88,21.34 X2.2
N$5
  Top 0.15: 26.44,20.58 26.44,19.98 29.47,16.95 30.07,16.95 30.22,17.11 30.38,17.11 U1.P$D2 | 26.44,20.58 26.6,20.73 27.2,20.73 27.35,20.58 27.35,20.28 C17.2 | 26.44,20.58 25.08,20.58 21.76,23.91 18.88,23.91 X2.1
N$6
  Top 0.15: U1.P$C1 29.92,17.41 29.77,17.41 29.01,18.16 29.01,21.34 C5.2
N$8
  Top 0.15: L2.2 30.22,19.37 30.22,19.98 L3.1
N$9
  Top 0.15: IC1.D1 23.12,11.06 21.91,12.27 R9.2
N$10  (1 unrouted)
N$11  (1 unrouted)
N$12
  Top 0.15: U1.P$B3 30.68,17.86 30.22,18.32 L2.1
N$13  (1 unrouted)
  Top 0.15: C3.1 37.78,16.05 38.09,16.05 38.39,16.35 L1.1
N$14
  Top 0.15: U1.P$A18 34.46,18.32 34.46,18.77 C13.1
N$15  (2 unrouted)
  Top 0.15: 31.13,19.98 31.74,19.98 C16.1 | U1.P$B5 31.13,17.86 31.13,18.77 C15.1 31.13,18.92 31.13,19.98 | 31.13,19.98 L3.2
N$16
  Top 0.15: U1.P$N24 36.42,14.84 36.88,15.29 C9.1
N$17
  Top 0.15: U1.P$B24 36.42,17.86 37.03,18.47 X1.1 37.18,18.47 37.78,17.86 C1.1
N$18
  Top 0.15: U1.P$D23 35.97,17.11 36.12,17.11 36.27,17.26 36.42,17.26 C11.1
N$19
  Top 0.15: U1.P$A23 35.97,18.32 35.97,18.62 36.42,19.07 36.42,20.28 36.57,20.43 37.94,20.43 38.54,19.83 X1.3 38.69,19.83 39.45,19.07 39.45,18.92 39.9,18.47 C2.1
N$20
  Top 0.15: L1.2 39.45,16.5 39.9,16.5 C4.1 40.05,16.65 40.5,16.65 | 40.5,16.65 40.96,16.65 C22.1 | 40.5,16.65 40.5,17.71 40.66,17.86 40.66,26.48 38.84,28.29 ANT1.1
N$21
  Top 0.15: R1_USB.2 26.75,31.17 26.75,27.99 J4.A5
N$22
  Top 0.15: D5.2 14.65,31.02 13.44,31.02 C2-EP-DR.2 13.44,30.87 13.44,29.96 L5.2 13.44,29.81 13.44,27.54 Q3.3
N$23
  Top 0.15: C2-EP-DR.1 13.44,31.92 14.5,31.92 D4.2 14.65,32.07 14.65,33.28 D2.1
N$26
  Top 0.15: IC2.A2 7.54,29.81 6.94,29.81 C32.1
N$27
  Top 0.15: R_TYPE_SEL.2 16.92,28.9 16.92,29.35 R1_EP_DR.1 16.92,29.5 17.98,29.5 SJ1.2
N$30
  Top 0.15: J1.4 11.17,21.94 10.11,21.94 9.51,22.55 9.51,22.85 12.23,25.57 13.59,25.57 14.8,26.78 14.8,27.24 14.95,27.39 16.16,27.39 16.31,27.24 16.31,23.76 14.65,22.1 13.14,22.1 EPD_C2.2
N$31
  Top 0.15: EPD_C1.2 12.99,20.58 12.68,20.89 12.68,21.04 12.38,21.34 11.78,21.34 11.63,21.49 11.32,21.49 J1.5
N$32  (via drill 0.35)
  Top 0.15: v24.33,30.56 24.18,30.56 23.72,31.02 R2_USB.1 | v23.87,26.78 23.87,27.09 23.72,27.24 23.72,27.84 J4.B5
  Bottom 0.15: v24.33,30.56 24.33,27.24 v23.87,26.78
N$33
  Top 0.15: J1.24 11.32,11.96 11.32,10.76 EPD_C12.2
N$35
  Top 0.15: J1.22 11.17,13.02 10.11,13.02 9.51,12.42 9.51,11.81 10.72,10.6 10.72,10.15 10.87,10 12.84,10 14.95,12.12 14.95,13.02 EPD_C10.2
N$36  (via drill 0.35)
  Top 0.15: v9.66,13.93 11.17,13.93 J1.20 | v14.35,17.26 14.35,16.65 13.14,15.44 13.14,14.08 EPD_C8.2
  Bottom 0.15: v9.66,13.93 9.66,14.38 9.51,14.54 9.51,14.84 11.93,17.26 v14.35,17.26
N$37  (via drill 0.35)
  Top 0.15: v10.27,14.69 10.42,14.54 11.17,14.54 J1.19 | v14.05,15.44 14.05,14.69 13.89,14.54 EPD_C7.2
  Bottom 0.15: v10.27,14.69 13.29,14.69 v14.05,15.44
N$38
  Top 0.15: J1.18 11.32,14.99 11.93,14.99 13.59,16.65 13.59,17.41 14.2,18.01 14.5,18.01 16.16,16.35 16.16,15.14 EPD_C6.2
OUT+  (via drill 0.35)
  Top 0.15: v5.88,30.41 7.24,30.41 7.39,30.26 7.85,30.26 IC2.A3 | 6.18,32.68 TP_OP.TP
  Top 0.3: 6.18,32.68 v7.24,31.62
  Bottom 0.15: v5.88,30.41 7.09,31.62 v7.24,31.62
OUT-  (1 unrouted)
P0.13/1.5D
  Top 0.15: R5.1 7.09,7.73 7.09,7.58 9.81,4.86 10.57,4.86 SW_UP.2 10.72,4.86 10.72,5.31 11.32,5.92 11.48,5.92 C30.1
P0.14/1.5D
  Top 0.15: R8.1 22.66,7.43 22.66,6.37 C31.1 22.51,6.22 21.61,5.31 21.61,4.86 SW_ENT.2
P1.01/1.6C
  Top 0.15: R_PWR_EPD.1 11.17,32.07 10.27,32.98 Q1.1
P1.02/1.6C
  Top 0.15: R7.1 26.44,3.5 28.41,3.5 28.86,3.04 C29.1 29.01,2.89 30.83,4.71 32.49,4.71 SW_DN.2
PMIC_INT  (1 unrouted)
PREVGH  (via drill 0.35)
  Top 0.15: EPD_C11.2 12.08,12.42 11.32,12.42 J1.23 11.17,12.42 10.42,12.42 v10.27,12.27 | v17.07,30.71 17.98,30.71 18.13,30.87 D5.1
  Bottom 0.15: v10.27,12.27 11.78,12.27 17.07,17.56 v17.07,30.71
PREVGL
  Top 0.15: J1.21 11.17,13.48 10.11,13.48 9.21,12.57 9.21,11.66 10.42,10.45 10.42,10 10.72,9.7 12.99,9.7 15.25,11.96 15.25,12.27 16.01,13.02 16.31,13.02 16.92,13.63 EPD_C9.2 16.92,13.78 17.82,14.69 17.82,15.9 17.22,16.5 17.22,24.67 19.49,26.93 19.49,32.07 18.28,33.28 D2.2
RESE  (via drill 0.35)
  Top 0.15: R1_EP_DR.2 16.16,29.35 16.16,28.6 15.71,28.14 Q3.2 15.56,28.14 v14.35,28.14 | v10.27,22.7 10.42,22.55 11.17,22.55 J1.3
  Bottom 0.15: v10.27,22.7 10.27,24.06 v14.35,28.14
RESET  (2 unrouted)
SCL/1.4C
  Top 0.15: IC2.C1 8.3,28.75 9.36,28.75 9.81,28.29 9.81,27.99 U3.7
SCL/2.4C  (via drill 0.35)  (2 unrouted)
  Top 0.15: v28.11,10.91 29.01,10 R4.1 | v27.35,13.78 26.14,14.99 25.84,14.99 | 25.84,14.99 24.48,14.99 IC3.12 | v22.06,20.28 21,20.28 R17.2 | 25.84,14.99 25.84,17.26 TP_SCL.TP
  Bottom 0.15: v28.11,10.91 28.11,13.02 v27.35,13.78 27.96,14.38 27.96,14.99 27.35,15.59 26.75,15.59 v22.06,20.28
SDA/1.4C  (1 unrouted)
SDA/2.4C  (via drill 0.35)  (1 unrouted)
  Top 0.15: R18.2 23.42,16.35 23.42,17.56 TP_SDA.TP 23.42,17.71 24.02,17.71 v24.78,18.47 | v24.33,10.76 23.42,10.76 23.27,10.6 IC1.C1 | v29.77,8.49 30.53,8.49 R2.1 | v29.32,15.59 29.62,15.29 29.92,15.29 U1.P$L1
  Bottom 0.15: v24.33,10.76 25.08,10.76 27.35,8.49 v29.77,8.49 30.38,9.09 30.38,11.06 29.32,12.12 v29.32,15.59 26.44,18.47 v24.78,18.47
SWDCLK  (1 unrouted)
  Top 0.15: U1.P$AA24 36.42,12.87 36.88,12.87 39.3,15.29 40.96,15.29 43.38,17.71 43.83,17.71 TP_SWDCLK.TP
SWDIO  (1 unrouted)
  Top 0.15: U1.P$AC24 36.42,12.27 36.72,12.27 38.84,14.38 41.87,14.38 TP_SWDIO.TP
SWO  (1 unrouted)
VBAT/1.2A
  Top 0.15: 9.66,25.27 9.66,25.88 U3.2 9.81,26.03 10.27,26.03 U3.3 | 9.66,25.27 9.66,24.97 C27.2 | 9.66,25.27 7.85,25.27 6.64,26.48 | 2.25,26.48 TP_VBAT.TP
  Top 0.3: 2.25,26.48 6.64,26.48
VBAT/2.5C
  Top 0.15: IC1.C2 22.82,10.45 21.61,10.45 21.3,10.76 20.55,10.76 C37.1
VBUS/1.5D  (3 unrouted)
  Top 0.15: C43.1 27.65,26.63 27.65,25.12 25.39,22.85 25.39,22.55 D3.5
VBUS/2.6D
  Top 0.15: U1.P$AD2 30.38,11.81 29.92,11.81 C21.1 29.77,11.66 26.14,11.66 23.72,9.24 | 23.72,9.24 23.27,9.7 IC1.A2 | 23.72,9.24 C38.1
VREG  (via drill 0.35)  (2 unrouted)
  Top 0.15: v18.88,10.3 16.77,10.3 16.62,10.15 16.62,9.85 C23.2 | C39.1 20.4,10 v21.15,10 21.61,10 22.51,9.09 C24.1 | 24.33,8.64 24.33,8.18 IC9.A1 | 24.33,8.64 24.33,8.94 IC9.A3 | 24.33,8.64 IC9.A2
  Bottom 0.15: v18.88,10.3 20.85,10.3 v21.15,10